# EAGLE board CT_schematic (EAGLE 7.6.0)

Size 100 x 80 mm. Coordinates in mm from the lower left corner, seen from the top.
Outline: 0,0 100,0 100,80 0,80 0,0
Copper layers (1*16): Top 0.035mm / dielectric 1.5mm / Bottom 0.035mm
Design rules "default": minimum track width 10mil, minimum drill 24mil, track to track 8mil, track to pad 8mil, pad to pad 8mil, via to via 8mil, smd to smd 8mil, copper to edge 40mil, drill to drill 8mil, minimum pad ring 10mil, minimum via ring 8mil, stop-mask expansion 4mil, vias tented up to drill 0mil, thermal gap 10mil

## Footprints (pad centres in the part's own frame; a part is rotated, then mirrored left to right if it is on the bottom)
C0603 = smd 0.8 x 0.8: 1 -0.762,0; 2 0.762,0
C0402 = smd 0.5 x 0.5: 1 -0.508,0; 2 0.508,0
C1210 = smd 1.2 x 2.5: 1 -1.524,0; 2 1.524,0
EXV-9H = smd 3.505 x 1.676: 1 -2.857,0; 2 2.857,0
L0603 = smd 0.8 x 0.8: 1 -0.762,0; 2 0.762,0
PJ-037B_PACKAGE = drill 3.7 square: 1 12,0 | drill 3.2 square: 2 6,0
R0603 = smd 0.8 x 0.8: 1 -0.762,0; 2 0.762,0
LQFP48 = smd 0.3 x 1.2: 1 -2.75,-4.25; 2 -2.25,-4.25; 3 -1.75,-4.25; 4 -1.25,-4.25; 5 -0.75,-4.25; 6 -0.25,-4.25; 7 0.25,-4.25; 8 0.75,-4.25; 9 1.25,-4.25; 10 1.75,-4.25; 11 2.25,-4.25; 12 2.75,-4.25; 25 2.75,4.25; 26 2.25,4.25; 27 1.75,4.25; 28 1.25,4.25; 29 0.75,4.25; 30 0.25,4.25; 31 -0.25,4.25; 32 -0.75,4.25; 33 -1.25,4.25; 34 -1.75,4.25; 35 -2.25,4.25; 36 -2.75,4.25 | smd 1.2 x 0.3: 13 4.25,-2.75; 14 4.25,-2.25; 15 4.25,-1.75; 16 4.25,-1.25; 17 4.25,-0.75; 18 4.25,-0.25; 19 4.25,0.25; 20 4.25,0.75; 21 4.25,1.25; 22 4.25,1.75; 23 4.25,2.25; 24 4.25,2.75; 37 -4.25,2.75; 38 -4.25,2.25; 39 -4.25,1.75; 40 -4.25,1.25; 41 -4.25,0.75; 42 -4.25,0.25; 43 -4.25,-0.25; 44 -4.25,-0.75; 45 -4.25,-1.25; 46 -4.25,-1.75; 47 -4.25,-2.25; 48 -4.25,-2.75
SOIC-8 = smd 1.6 x 0.6: 1 -2.7,1.905 | smd 1.55 x 0.6: 2 -2.7,0.635; 3 -2.7,-0.635; 4 -2.7,-1.905; 5 2.7,-1.905; 6 2.7,-0.635; 7 2.7,0.635; 8 2.7,1.905
ABS07-32.768KHZ-7-T = smd 1.1 x 2.4: 1 -2.5,0; 2 0,0
ABLS-25.000MHZ-B2F-T = smd 5.6 x 2.8: 1 -3.81,0; 2 5.69,0
WSON-8 = smd 0.3 x 0.6: 1 -0.75,0; 2 0.05,0; 3 0.85,0; 4 1.65,0; 5 1.65,3.8; 6 0.85,3.8; 7 0.05,3.8; 8 -0.75,3.8 | smd 3 x 2.6: PAD 0.45,1.9
SON-6 = smd 0.55 x 0.3: 1 -0.355,0.5 | smd 0.52 x 0.3: 2 -0.37,0; 3 -0.37,-0.5; 4 0.37,-0.5; 5 0.37,0; 6 0.37,0.5
SW_4-1437565-2 = smd 1.4 x 2.1: 1 -2.23,4.55; 2 -2.23,-4.55; 3 2.23,4.55; 4 2.23,-4.55
LGM67K-G1J2-24-Z = smd 0.8 x 1.4: A -2,0; C 0,0
NC7SZ125M5X = smd 1.3 x 0.7: 1 -1.3,0.95; 2 -1.3,0; 3 -1.3,-0.95; 4 1.3,-0.95; 5 1.3,0.95

## Placement (x,y rotation side)
C1  1e-06  [C0603]  -22.86,57.15 0 top  (outside the outline)
C2  1e-07  [C0603]  -26.67,57.15 0 top  (outside the outline)
C3  1e-07  [C0603]  -30.48,57.15 0 top  (outside the outline)
C4  1e-07  [C0603]  -34.29,57.15 0 top  (outside the outline)
C5  4.7e-06  [C0603]  -19.05,57.15 0 top  (outside the outline)
C6  1e-07  [C0603]  -38.1,57.15 0 top  (outside the outline)
C7  1e-08  [C0603]  -41.91,57.15 0 top  (outside the outline)
C8  1e-06  [C0603]  -45.72,57.15 0 top  (outside the outline)
C9  1e-11  [C0402]  -22.86,62.23 0 top  (outside the outline)
C10  1e-11  [C0402]  -26.67,62.23 0 top  (outside the outline)
C11  1e-11  [C0402]  -30.48,62.23 0 top  (outside the outline)
C12  1e-11  [C0402]  -34.29,62.23 0 top  (outside the outline)
C13  1e-08  [C0402]  -38.1,62.23 0 top  (outside the outline)
C14  1e-08  [C0402]  -41.91,62.23 0 top  (outside the outline)
C15  1e-08  [C0402]  -45.72,62.23 0 top  (outside the outline)
C16  1e-05  [C1210]  -29.21,44.45 0 top  (outside the outline)
C17  1e-05  [C1210]  -35.56,44.45 0 top  (outside the outline)
C18  1e-07  [C0402]  -49.53,62.23 0 top  (outside the outline)
C19  0.0001  [EXV-9H]  -38.1,29.21 0 top  (outside the outline)
C20  0.0001  [EXV-9H]  -49.53,29.21 0 top  (outside the outline)
C21  1e-08  [C0402]  -53.34,62.23 0 top  (outside the outline)
F1  240.0  [L0603]  -49.53,57.15 0 top  (outside the outline)
J1  PJ-037B  [PJ-037B_PACKAGE]  -27.94,7.62 0 top  (outside the outline)
R1  10000.0  [R0603]  -15.24,52.07 0 top  (outside the outline)
R2  1000.0  [R0603]  -53.34,57.15 0 top  (outside the outline)
R3  1270.0  [R0603]  -57.15,57.15 0 top  (outside the outline)
R4  4700.0  [R0603]  -60.96,57.15 0 top  (outside the outline)
R5  10000.0  [R0603]  -20.32,52.07 0 top  (outside the outline)
R6  10000.0  [R0603]  -25.4,52.07 0 top  (outside the outline)
R7  10000.0  [R0603]  -30.48,52.07 0 top  (outside the outline)
R8  10000.0  [R0603]  -35.56,52.07 0 top  (outside the outline)
R9  10000.0  [R0603]  -40.64,52.07 0 top  (outside the outline)
R10  10000.0  [R0603]  -45.72,52.07 0 top  (outside the outline)
R11  10000.0  [R0603]  -50.8,52.07 0 top  (outside the outline)
R12  100000.0  [R0603]  -46.99,44.45 0 top  (outside the outline)
R13  1500.0  [R0603]  -15.24,62.23 0 top  (outside the outline)
R14  1000.0  [R0603]  -19.05,62.23 0 top  (outside the outline)
R15  10000.0  [R0603]  -55.88,52.07 0 top  (outside the outline)
R16  10000.0  [R0603]  -60.96,52.07 0 top  (outside the outline)
R17  18000.0  [R0603]  -15.24,57.15 0 top  (outside the outline)
R18  470000.0  [R0603]  -52.07,44.45 0 top  (outside the outline)
R19  120000.0  [R0603]  -57.15,44.45 0 top  (outside the outline)
U1  stm32f051c8t6  [LQFP48]  -22.86,20.32 0 top  (outside the outline)
U2  AT25160B-SSHL-T  [SOIC-8]  -39.37,19.05 0 top  (outside the outline)
U3  AT25160B-SSHL-T  [SOIC-8]  -55.88,19.05 0 top  (outside the outline)
U4  ABS07-32.768KHZ-7-T  [ABS07-32.768KHZ-7-T]  -49.53,38.1 0 top  (outside the outline)
U5  ABLS-25.000MHZ-B2F-T  [ABLS-25.000MHZ-B2F-T]  -26.67,38.1 0 top  (outside the outline)
U6  LP3878SDX-ADJ/NOPB  [WSON-8]  -30.48,27.94 0 top  (outside the outline)
U7  TPS3895ADRYR  [SON-6]  -55.88,60.96 0 top  (outside the outline)
U8  4-1437565-2  [SW_4-1437565-2]  -44.45,6.35 0 top  (outside the outline)
U9  Q65110A2395  [LGM67K-G1J2-24-Z]  -17.78,45.72 0 top  (outside the outline)
U10  nc7sz125m5x  [NC7SZ125M5X]  -40.64,44.45 0 top  (outside the outline)

## Library data of the parts
C1-C21 F1 J1 R1-R19 U1-U10 = circuit_tree

## Nets
CLK_CRYSTAL_U1_3: C9.1 U1.3 U4.1
CLK_CRYSTAL_U1_4: C10.1 U1.4 U4.2
CLK_CRYSTAL_U1_5: C11.1 U1.5 U5.1
CLK_CRYSTAL_U1_6: C12.1 U1.6 U5.2
GND: C1.2 C2.2 C3.2 C4.2 C5.2 C6.2 C7.2 C8.2 C9.2 C10.2 C11.2 C12.2 C13.2 C14.2 C15.2 C16.2 C17.2 C18.2 C19.2 C20.2 C21.2 J1.2 R2.2 R5.2 R14.2 R17.2 R19.2 U1.8 U1.23 U1.47 U2.4 U3.4 U6.3 U6.PAD U7.2 U9.C U10.1 U10.3
NET_U1_7: R4.1 U1.7 U10.4
NET_U1_9: C7.1 C8.1 F1.1 U1.9
NET_U1_44: R5.1 U1.44
NET_U1_45: R3.1 U1.45 U9.A
NET_U1_46: R1.1 U1.46 U8.3 U8.4
NET_U2_3: R6.1 U2.3
NET_U2_7: R8.1 U2.7
NET_U3_3: R9.1 U3.3
NET_U3_7: R11.1 U3.7
NET_U6_1: C15.1 U6.1
NET_U6_6: R13.2 R14.1 U6.6
NET_U6_8: R12.1 U6.8
NET_U7_1: R16.1 R17.1 U7.1
NET_U7_3: R18.2 R19.1 U7.3
NET_U7_4: R15.1 U7.4 U10.2
NET_U8_1: R2.1 U8.1 U8.2
PROC_SPI1_MISO: U1.16 U2.2
PROC_SPI1_MOSI: U1.17 U2.5
PROC_SPI1_NSS: R7.1 U1.14 U2.1
PROC_SPI1_SCK: U1.15 U2.6
PROC_SPI2_MISO: U1.27 U3.2
PROC_SPI2_MOSI: U1.28 U3.5
PROC_SPI2_NSS: R10.1 U1.25 U3.1
PROC_SPI2_SCK: U1.26 U3.6
VCC_S1_14V7: C16.1 C19.1 C20.1 J1.1 R12.2 U6.4
VCC_TIER1_2V5: C1.1 C2.1 C3.1 C4.1 C5.1 C6.1 C13.1 C14.1 C17.1 C18.1 C21.1 F1.2 R1.2 R3.2 R4.2 R6.2 R7.2 R8.2 R9.2 R10.2 R11.2 R13.1 R15.2 R16.2 R18.1 U1.1 U1.24 U1.48 U2.8 U3.8 U6.5 U7.6 U10.5

## Tracks (layer width: path | path; a pad name or v marks a point on that pad's centre or on a via)
CLK_CRYSTAL_U1_3  (2 unrouted)
CLK_CRYSTAL_U1_4  (2 unrouted)
CLK_CRYSTAL_U1_5  (2 unrouted)
CLK_CRYSTAL_U1_6  (2 unrouted)
GND  (37 unrouted)
NET_U1_7  (2 unrouted)
NET_U1_9  (3 unrouted)
NET_U1_44  (1 unrouted)
NET_U1_45  (2 unrouted)
NET_U1_46  (3 unrouted)
NET_U2_3  (1 unrouted)
NET_U2_7  (1 unrouted)
NET_U3_3  (1 unrouted)
NET_U3_7  (1 unrouted)
NET_U6_1  (1 unrouted)
NET_U6_6  (2 unrouted)
NET_U6_8  (1 unrouted)
NET_U7_1  (2 unrouted)
NET_U7_3  (2 unrouted)
NET_U7_4  (2 unrouted)
NET_U8_1  (2 unrouted)
PROC_SPI1_MISO  (1 unrouted)
PROC_SPI1_MOSI  (1 unrouted)
PROC_SPI1_NSS  (2 unrouted)
PROC_SPI1_SCK  (1 unrouted)
PROC_SPI2_MISO  (1 unrouted)
PROC_SPI2_MOSI  (1 unrouted)
PROC_SPI2_NSS  (2 unrouted)
PROC_SPI2_SCK  (1 unrouted)
VCC_S1_14V7  (5 unrouted)
VCC_TIER1_2V5  (32 unrouted)